# Altium PCB PCB_SHT40-BMP280.PcbDoc
Units mil, origin at the board's own origin, x right, y up, seen from the top; angles counter-clockwise.
Board outline 1889.76 x 944.88 mil, 2 copper layers (Top Layer, Bottom Layer); 11 components, 5 nets, 39 pads, 5 vias.
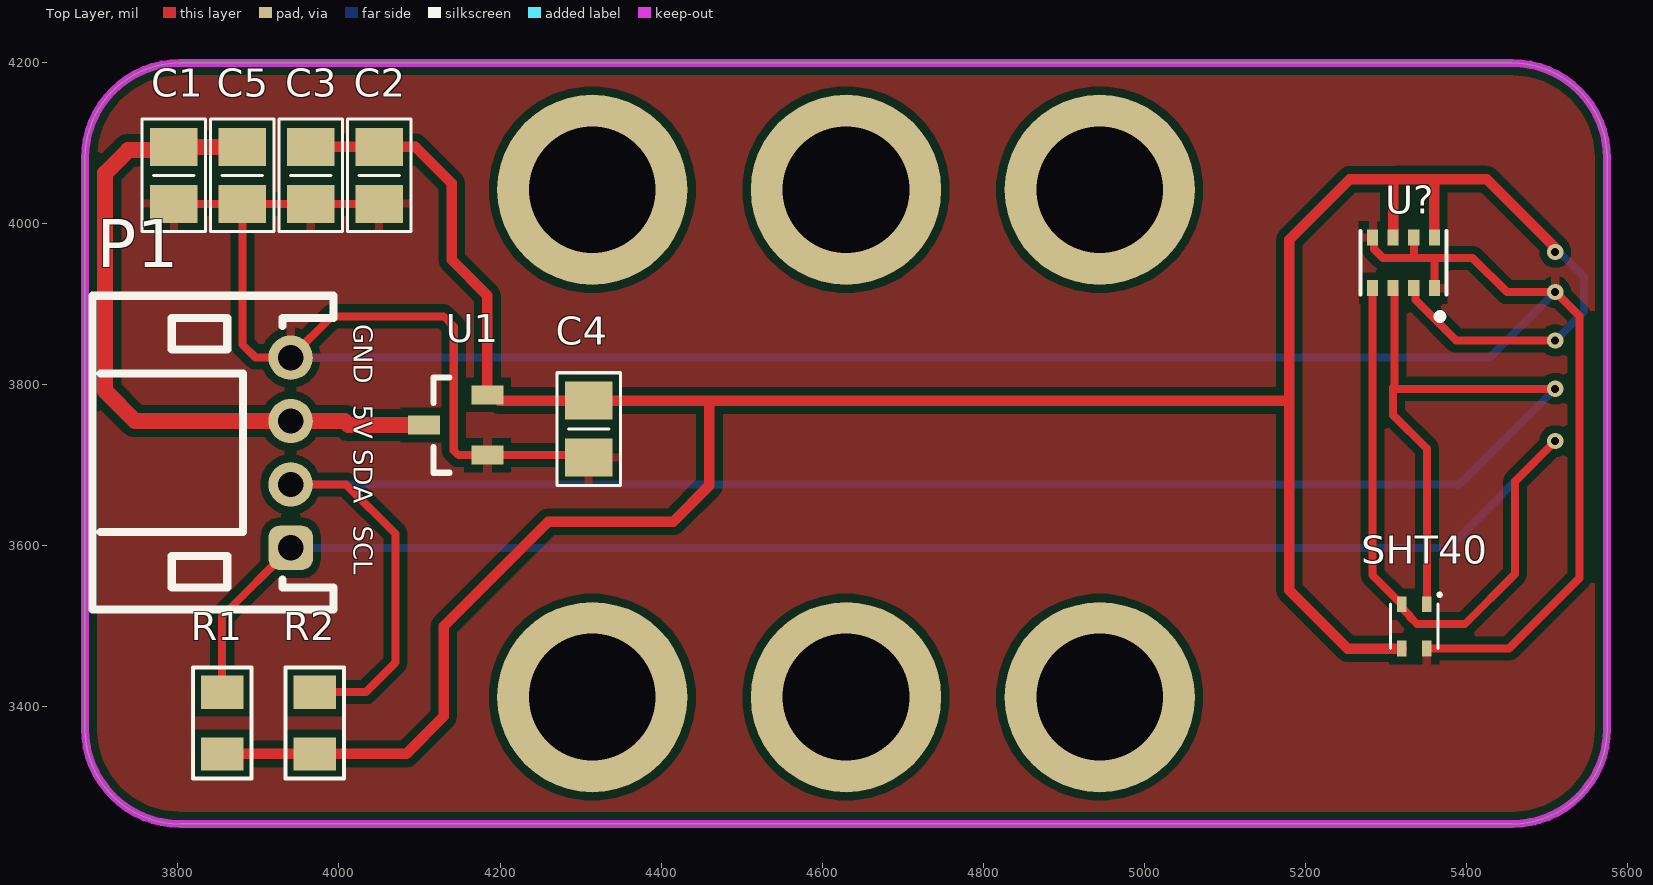
[diagram p0: Top Layer view]
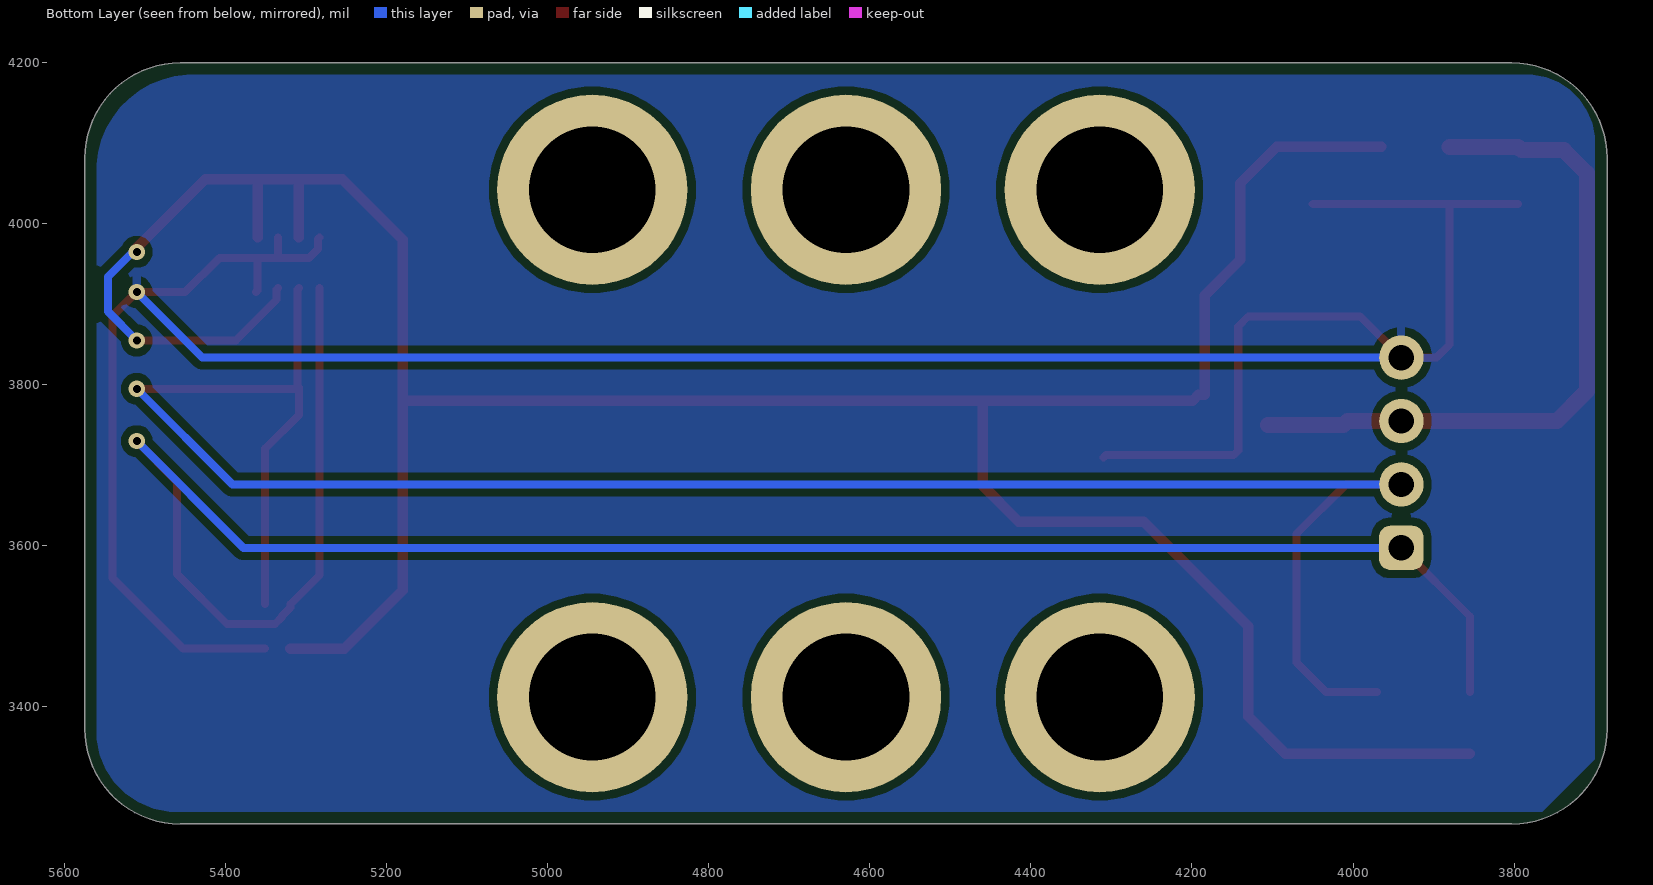
[diagram p1: Bottom Layer view, seen from below]
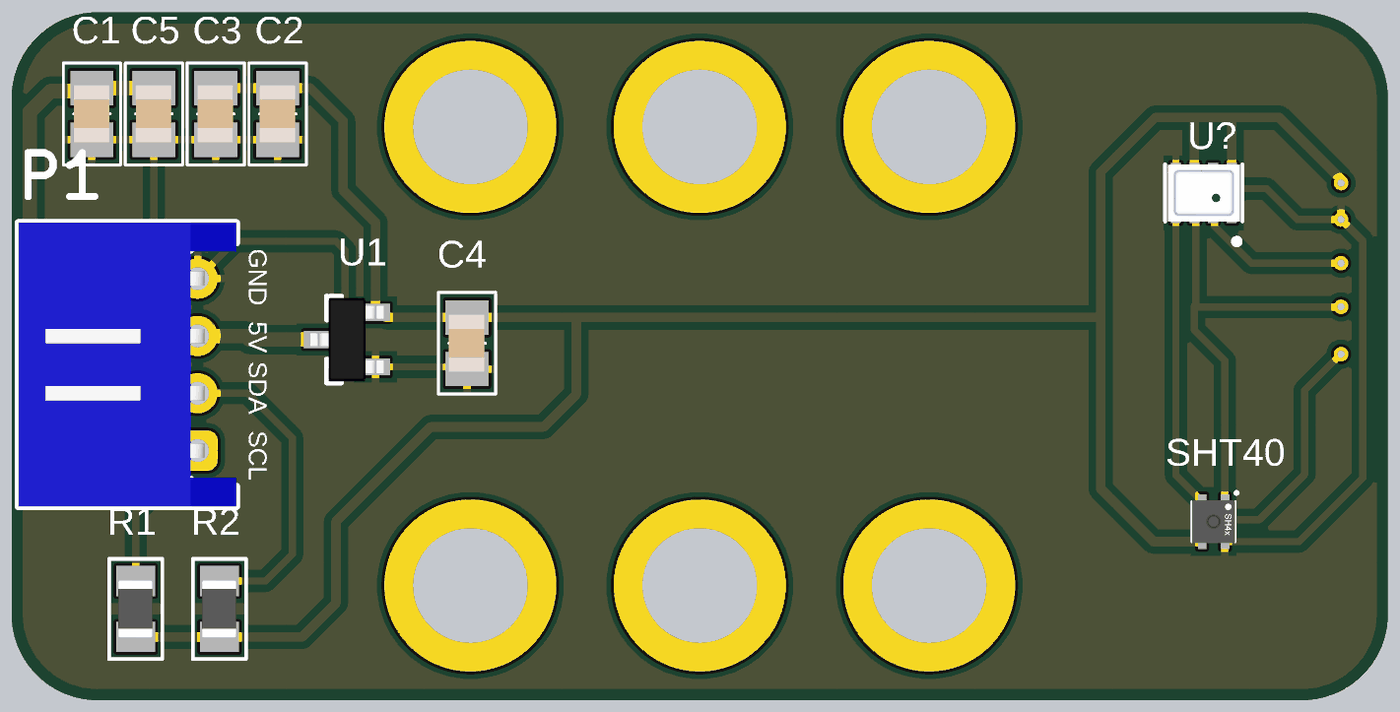
[diagram p2: 3D render of the assembled board from above, using the file's embedded part models]

## Layer stack, top to bottom
Top Solder: solder mask 0.4, Solder Resist, Dk 3.5
Top Layer: signal copper 1.4
Dielectric 1: dielectric 12.6, FR-4, Dk 4.8
Bottom Layer: signal copper 1.4
Bottom Solder: solder mask 0.4, Solder Resist, Dk 3.5

## Board outline
3684.61,3372.8 3684.61,4081.46 cw(c3802.72,4081.46) 3802.72,4199.57 5456.26,4199.57 cw(c5456.26,4081.46) 5574.37,4081.46 5574.37,3372.8 cw(c5456.26,3372.8) 5456.26,3254.69 3802.72,3254.68 cw(c3802.72,3372.8)

## Design rules (kind name [scope] priority, off if disabled: settings)
Clearance [All] p1: gap=10 ignorepadtopadclearanceinfootprint=FALSE except(0: Arc-Hole Track-Hole SMDPad-Hole THPad-Hole Via-Hole Fill-Hole Poly-Hole Region-Hole Text-Hole)
PolygonConnect [All] p1: connectstyle=Relief reliefconductorwidth=10 reliefentries=4 polygonreliefangle="90 Angle" airgapwidth=10
RoutingVias [All] p1: holewidth=28 width=50 viastyle="Through Hole" minholewidth=28 minwidth=50 maxholewidth=28 maxwidth=50
SolderMaskExpansion [All] p1: expansion=4 istentingtop=FALSE
Width [All] p1: maxlimit=50 minlimit=10 preferedwidth=10 minimp=50.000000 maximp=50.000000 favimp=50.000000
30 further rules are at their usual default settings.

## Classes and differential pairs
component class Sch_SHT40-BMP280: C1 C4 C5 P1 R1 R2 SHT40 U1 U?

## Components (designator, comment, footprint, x,y, rotation, side; value= is the part's Value field where it differs from the comment)
C1 "10u" "C 0805" 3795,4060 r270 top
C2 "10u" "C 0805" 4050,4060 r270 top
C3 "100n" "C 0805" 3965,4060 r270 top
C4 "100N" "C 0805" 4310,3745 r270 top
C5 "100n" "C 0805" 3880,4060 r270 top
P1 "Header 4" HDR/Header/4/2mm/BOX/RA 3940,3715.63 r90 top
R1 "4.7K" "R 0805" 3855,3380 r270 top
R2 "4.7K" "R 0805" 3970,3380 r270 top
SHT40 "SHT40-AD1B-R2" SHT4X 5335,3500 r270 top
U1 "" SOT-23 4145,3750 r180 top
U? "BMP280" XDCR_BMP280 5321.61,3951.5 r270 top

## Footprints (in the part's own frame and the unit in brackets; to place one, negate y for a bottom-side part, rotate by r counter-clockwise, add the part's x,y. Pads: shape width x height; smd on the part's side, far side on the other; paste and mask are expansions set on the pad)
"C 0805" [mm] "Chip Capacitor, 2-Leads, Body 2.0x1.3mm, IPC Medium Density"
  rect 1.2x1.5 smd: 1(-0.9,0) 2(0.9,0)
  silkscreen extent -1.78,-1 1.78,1, body extent -1,-0.64 1,0.61, height 0.6
HDR/Header/4/2mm/BOX/RA [mm]
  rrect50% 1.4x1.4 hole 0.8: 1(-3,0)
  round 1.4 hole 0.8: 2(-1,0) 3(1,0) 4(3,0)
  silkscreen extent -4.95,-1.35 4.95,6.25, body extent -4.95,-1.35 4.95,6.25, height 4.8
"R 0805" [mm] "Chip Resistor, 2-Leads, Body 2.0x1.3mm, IPC Medium Density"
  rect 1.05x1.35 smd: 1(-0.975,0) 2(0.975,0)
  silkscreen extent -1.75,-0.92 1.75,0.92, body extent -1,-0.61 1,0.59, height 0.5
SHT4X [mm]
  rect 0.5x0.3 smd: 1(-0.7,0.4) 2(-0.7,-0.4) 3(0.7,-0.4) 4(0.7,0.4)
  silkscreen extent -1.05,-0.75 0.7,0.85, body extent -0.75,-0.75 0.75,0.75, height 0.54
SOT-23 [mm] "SOT23, 3-Leads, Body 3.0x2.5mm (max), Pitch 0.95mm, IPC Medium Density"
  rect 1x0.6 smd: 1(-1,0.95) 2(-1,-0.95) 3(1,0)
  silkscreen extent 0.2,-1.5 0.7,1.5, body extent -1.28,-1.46 1.27,1.46, height 0.95
XDCR_BMP280 [mm]
  rect 0.5x0.35 smd: 1(0.8,0.975) 2(0.8,0.325) 3(0.8,-0.325) 4(0.8,-0.975) 5(-0.8,-0.975) 6(-0.8,-0.325) 7(-0.8,0.325) 8(-0.8,0.975)
  silkscreen extent -1,-1.35 1.79,1.35, body extent -1,-1.25 1,1.25, height 1

## Part data
C1 C2 C3 C4 C5: library part "Capacitor NP", "Capacitor non-pol"
P1: "Header, 4-Pin"
R1 R2: library part Resistor, "Resistor"
SHT40: "Humidity/Temperature Sensor Digital Serial (I2C) 4-Pin DFN EP T/R", PACKAGE=None, Availability="In Stock", Check_prices=https://www.snapeda.com/parts/SHT40-AD1B-R2/NSI/view-part/?ref=eda, MF="Sensirion AG", MP=SHT40-AD1B-R2, Price=None, Purchase-URL=https://pricing.snapeda.com/search/part/SHT40-AD1B-R2/?ref=eda, SnapEDA_Link=https://www.snapeda.com/parts/SHT40-AD1B-R2/NSI/view-part/?ref=snap
U1: library part XC6206P302MR-G, "LDO Voltage Regulators 1uA Low Quiescent 3 Terminal, Low ESR Cap. Compatible, Voltage Regulator", PACKAGE=SOT-23-3, BRAND="Torex Semiconductor", TYPE=SMD
U?: "BMP280 Absolute Barometric Pressure Sensor for Battery Powered Devices 2 x 2.5mm", PACKAGE=None, Availability=Unavailable, MP=BMP280, Price=None

## Free pads (board coordinates)
  round 236.22 hole 157.48: 2(4314.53,3412.17) 2(4314.53,4042.09) 2(4629.49,3412.17) 2(4629.49,4042.09) 2(4944.45,3412.17) 2(4944.45,4042.09)

## Via types
v1: diameter 20, hole 10, Top Layer to Bottom Layer, 5 vias

## Nets (pads, with @x,y where several pads share a name; then routed paths per layer and width w, separated by ;. In a path a pad name is that pad's centre, name@x,y a point inside that pad or via, vN(x,y) a via of type N, cw(c..) or ccw(c..) an arc to the next point about the centre after c; other vN are vias at no path point)
3.3V: C2.1 C3.1 C4.1 R1.2 R2.2 SHT40.3 U1.2 U?.2 U?.6 U?.8 | length 3890.2
  Top Layer w10: U?.2 5336.3,3918.11 5336.3,3905.76 5387.05,3855 v1(5510,3855)
  Top Layer w13: R1.2 R2.2 4083.39,3341.61 4130,3388.23 4130,3500 4260,3630 4415,3630 4460,3675 4460,3780.43 ; C3.1 C2.1 4094.57,4095.43 4140,4050 4140,3955 4184.37,3910.63 U1.2 4192.24,3787.4 4199.21,3780.43 C4.1 4460,3780.43 ; U?.6 5308.82,4053.23 5310.59,4055 ; SHT40.3 5252.56,3472.44 5180,3545 5180,3780 ; U?.8 5360,4055 ; v1(5510,3965) 5510,3970 5425,4055 5360,4055 ; 4460,3780.43 5179.57,3780.43 5180,3780 ; 5180,3780 5180,3980 5255,4055 5310.59,4055 ; 5310.59,4055 5360,4055
  Bottom Layer w10: v1(5510,3855) 5545.86,3890.86 5545.86,3934.14 5515,3965 v1(5510,3965)
+5: C1.1 C5.1 P1.3 U1.3 | length 867.9
  Top Layer w20: C5.1 C1.1 3790.9,4091.33 3738.19,4091.33 3709.61,4062.74 3709.61,3792.26 3746.86,3755 4006.86,3755 4011.86,3750 U1.3
GND: C1.2 C2.2 C3.2 C4.2 C5.2 P1.4 SHT40.4 U1.1 U?.1 U?.5 U?.7 | length 3578.4
  Top Layer w10: C1.2 C5.2 ; C2.2 C3.2 C5.2 ; C4.2 4306.97,3712.6 U1.1 4148.36,3712.6 4142.5,3718.46 4142.5,3872.5 4130,3885 3991.26,3885 P1.4 3896.26,3833.74 3880,3850 C5.2 ; U?.5 5285.12,3981.1 5285.12,3968.75 5296.37,3957.5 5335,3957.5 ; U?.7 5334.41,3958.09 5335,3957.5 ; SHT40.4 5452.44,3472.44 5540,3560 5540,3885.5 5510.5,3915 5450,3915 5407.5,3957.5 5360,3957.5 ; U?.1@5361.89,3915.16 5360,3917.05 U?.1 5360,3957.5 ; 5335,3957.5 5360,3957.5
  Bottom Layer w10: P1.4 5428.74,3833.74 v1(5510,3915)
SCL: P1.1 R1.1 SHT40.2 U?.4 | length 2612.3
  Top Layer w10: R1.1 3855,3512.52 P1.1 ; U?.4 5283.23,3563.58 SHT40.2 5319.25,3523.62 5329.84,3513.03 5329.84,3511.5 5338.63,3502.72 5397.72,3502.72 5460,3565 5460,3680 v1(5510,3730)
  Bottom Layer w10: P1.1 5377.52,3597.52 v1(5510,3730)
SDA: P1.2 R2.1 SHT40.1 U?.3 | length 2664
  Top Layer w10: P1.2 4008.74,3676.26 4070,3615 4070,3455 4033.39,3418.39 R2.1 ; U?.3 5310.59,3918.23 5310.59,3795 ; SHT40.1 5350.75,3720.65 5308.82,3762.58 5308.82,3796.77 5310.59,3795 ; v1(5510,3795) 5310.59,3795
  Bottom Layer w10: P1.2 5391.26,3676.26 v1(5510,3795)

## Polygon pours and split planes (outlines as drawn)
GND on Top Layer "GND_L01_P000" (solid, pour order 0): 3685,4105 cw(c3826.25,4053.75) 3775,4195 5470,4195 cw(c5470,4100) 5565,4100 5565,3360 cw(c5407.68,3412) 5459.69,3254.69 3830.31,3254.69 cw(c3830.31,3400) 3685,3400 3685,3405
GND on Bottom Layer "GND_L02_P002" (solid, pour order 2): 3700,4100 cw(c3785,4100) 3785,4185 5440,4185 cw(c5440,4065) 5560,4065 5560,3370 cw(c5460,3370) 5460,3270 3765,3270 3700,3335

## Keep-outs
Top Layer:
  the board outline again, w10

## Silkscreen, mask and mechanical layers (free items; w line width, h text height)
Top Overlay:
  text "GND" at 4010.44,3875 h40 r270
  text "5V" at 4010.44,3775 h40 r270
  text "SDA" at 4010.44,3720 h40 r270
  text "SCL" at 4010.44,3625 h40 r270